# Altium PCB USB_to_UART.PcbDoc
Units mil, origin at the board's own origin, x right, y up, seen from the top; angles counter-clockwise.
Board outline 6000 x 4000 mil, 2 copper layers (Top Layer, Bottom Layer), stack 61.8 mil thick; 15 components, 8 nets, 64 pads, 8 vias.
Unrouted connection lines stored in the file: 8.
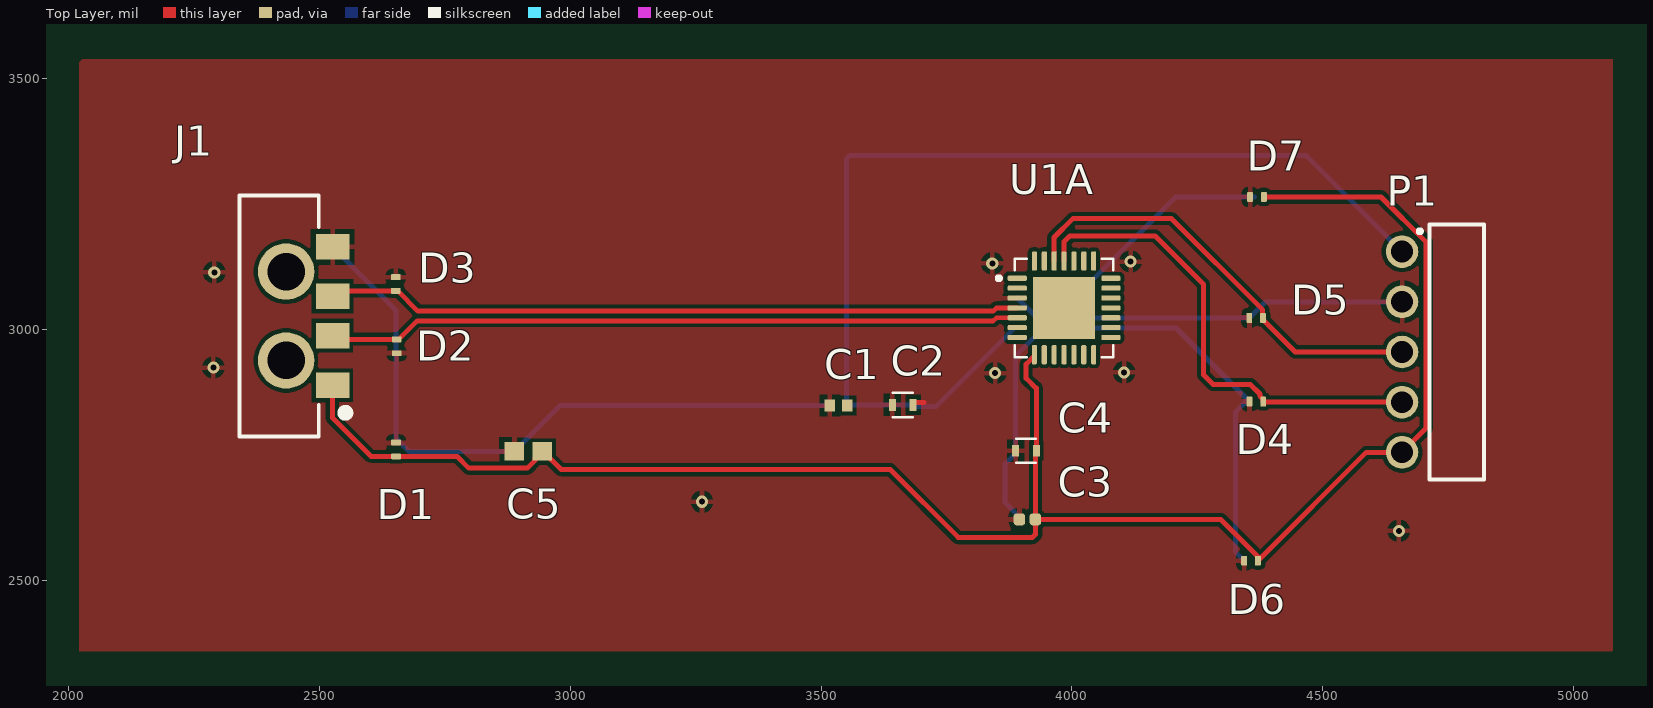
[diagram p0: Top Layer view]
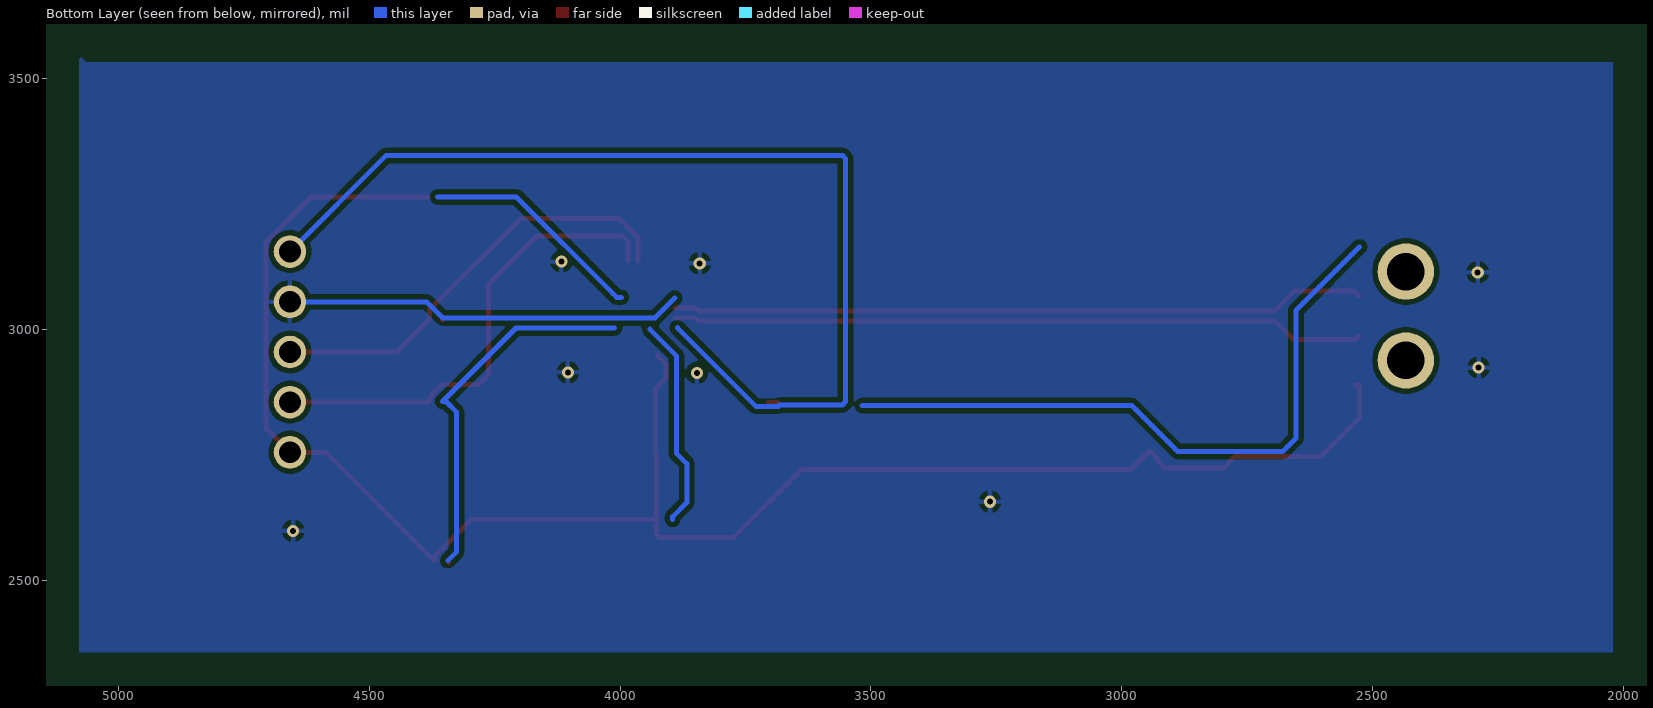
[diagram p1: Bottom Layer view, seen from below]
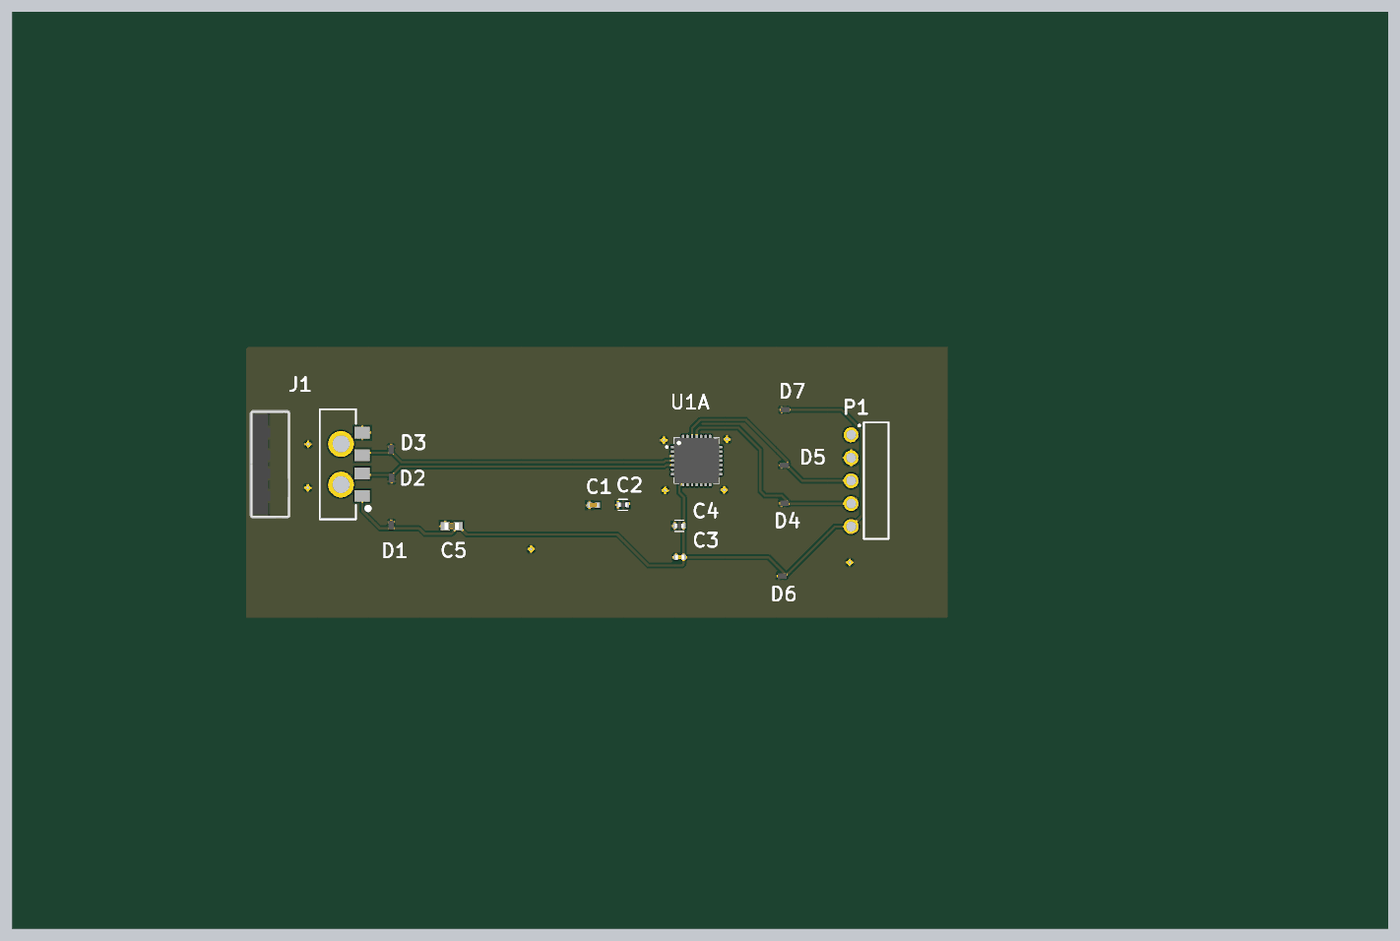
[diagram p2: 3D render of the assembled board from above, using the file's embedded part models]

## Layer stack, top to bottom
Top Solder: solder mask 0.4, SM-001, Dk 3.5
Top Layer: signal copper 1.4
Dielectric 1: core 59, FR-4, Dk 4.8
Bottom Layer: signal copper 1.4
Bottom Solder: solder mask 0.4, SM-001, Dk 3.5

## Board outline
1000,1000 7000,1000 7000,5000 1000,5000

## Design rules (kind name [scope] priority, off if disabled: settings)
Clearance [All] p1: gap=8 ignorepadtopadclearanceinfootprint=FALSE except(0: Arc-Hole Track-Hole SMDPad-Hole THPad-Hole Via-Hole Fill-Hole Poly-Hole Region-Hole Text-Hole)
DiffPairsRouting [InDifferentialPair('USB_D')] p1: maxlimit=5 minlimit=5 mostfreqgap=5 toplayer_minwidth=9.44 toplayer_maxwidth=9.44 toplayer_prefwidth=9.44 bottomlayer_minwidth=9.44 bottomlayer_maxwidth=9.44 bottomlayer_prefwidth=9.44 impedanceprofiledriven=TRUE impedanceprofileid={4D9A5D15-E294-4E31-8F8D-3654DE46FBC7} impedanceprofilevalue=90.000000 maxuncoupledlength=500
PolygonConnect [All] p1: connectstyle=Relief reliefconductorwidth=10 reliefentries=4 polygonreliefangle="90 Angle" airgapwidth=10
RoomDefinition USB_TO_UART_ [InComponentClass('USB_TO_UART_')] p1: confinementstyle=ConfineIn formatcopy=TRUE lockcomponents=FALSE outline 2018.25,2351.75 5077.97,2351.75 5077.97,3536.25 2018.25,3536.25
RoutingVias [All] p1: holewidth=12 width=25 viastyle="Through Hole" minholewidth=8 minwidth=15 maxholewidth=125 maxwidth=130
SolderMaskExpansion [All] p1: expansion=4 istentingtop=FALSE
Width [All] p1: maxlimit=10 minlimit=10 preferedwidth=10
29 further rules are at their usual default settings.

## Classes and differential pairs
differential pair USB_D: +USB_D_P -USB_D_N

## Components (designator, comment, footprint, x,y, rotation, side; value= is the part's Value field where it differs from the comment)
C1 "4.7uF" CAPC1005X65N 3534.75,2847.75 r0 top
C2 "100nF" CAPC1005X55N#1 3663,2849 r0 top
C3 "1uF" CAPC1005X55N#2 3911.25,2620.75 r0 top
C4 "100nF" CAPC1005X55N#1 3908.5,2757.75 r0 top
C5 "10uF" CAPC1608X90N 2916.5,2756.25 r0 top
D1 "" DIO_TPD1E10B06DPYR 2653,2760.25 r270 top
D2 "" DIO_TPD1E10B06DPYR 2654.5,2965.78 r90 top
D3 "" DIO_TPD1E10B06DPYR 2652.5,3090 r270 top
D4 "" DIO_TPD1E10B06DPYR 4367.53,2855.75 r0 top
D5 "" DIO_TPD1E10B06DPYR 4367.22,3022.25 r0 top
D6 "" DIO_TPD1E10B06DPYR 4357.03,2538.5 r0 top
D7 "" DIO_TPD1E10B06DPYR 4368.75,3263.5 r0 top
J1 "629004113921" 629004113921 2124.93,3026.12 r270 top
P1 "" 61300511021 4767,2954.5 r90 top
U1A "CP2102-GM" QFN50P500X500X100-29N 3984.31,3042.31 r0 top

## Footprints (in the part's own frame and the unit in brackets; to place one, negate y for a bottom-side part, rotate by r counter-clockwise, add the part's x,y. Pads: shape width x height; smd on the part's side, far side on the other; paste and mask are expansions set on the pad)
61300511021 [mm]
  round 1.65 hole 1.1: 1(5.08,2.77) 2(2.54,2.77) 3(0,2.77) 4(-2.54,2.77) 5(-5.08,2.77)
  silkscreen extent -6.45,-1.37 6.45,1.97
629004113921 [mm]
  rect 1.3x1.7 smd: 1(3.5,10.2) 2(1,10.2) 3(-1,10.2) 4(-3.5,10.2)
  round 2.85 hole 1.9: S1(-2.25,7.85) S2(2.25,7.85)
  silkscreen extent -6.1,5.5 6.1,11.05, body extent -6,-2.25 6,2.25, height 7.37
CAPC1005X55N#1 [mm]
  rect 0.35x0.6 smd: 1(-0.525,0) 2(0.525,0)
  silkscreen extent -0.5,-0.62 0.5,0.62, body extent -0.5,-0.25 0.5,0.25, height 0.55
CAPC1005X55N#2 [mm]
  rrect53% 0.59x0.6 smd: 1(-0.405,0) 2(0.405,0)
  body extent -0.5,-0.25 0.5,0.25, height 0.55
CAPC1005X65N [mm]
  rect 0.53x0.6 smd: 1(-0.437,0) 2(0.437,0)
  body extent -0.5,-0.25 0.5,0.25, height 0.55
CAPC1608X90N [mm]
  rect 1.01x0.93 smd: 1(-0.709,0) 2(0.709,0)
  body extent -0.8,-0.4 0.8,0.4, height 0.9
DIO_TPD1E10B06DPYR [mm]
  rrect35% 0.3x0.5 smd paste+0 mask+0: 1(-0.35,0) 2(0.35,0)
  body extent -0.5,-0.3 0.5,0.3, height 0.45
QFN50P500X500X100-29N [mm]
  rrect50% 0.97x0.26 smd: 1(-2.37,1.5) 2(-2.37,1) 3(-2.37,0.5) 4(-2.37,0) 5(-2.37,-0.5) 6(-2.37,-1) 7(-2.37,-1.5) 15(2.37,-1.5) 16(2.37,-1) 17(2.37,-0.5) 18(2.37,0) 19(2.37,0.5) 20(2.37,1) 21(2.37,1.5)
  rrect50% 0.26x0.97 smd: 8(-1.5,-2.37) 9(-1,-2.37) 10(-0.5,-2.37) 11(0,-2.37) 12(0.5,-2.37) 13(1,-2.37) 14(1.5,-2.37) 22(1.5,2.37) 23(1,2.37) 24(0.5,2.37) 25(0,2.37) 26(-0.5,2.37) 27(-1,2.37) 28(-1.5,2.37)
  rect 3.15x3.15 smd paste-0.585: 29(0,0)
  silkscreen extent -3.4,-2.5 2.5,2.5, body extent -2.5,-2.5 2.5,2.5, height 1

## Part data
C1: library part C1005X5R1A475K050BC, "Capacitance:4.7ÂµF; Voltage(DC):10V; Capacitor Case / Package:0402 [1005 Metric]; Capacitance Tolerance:Â± 10%; Dielectric Characteristic:X5R; Product Range:C Series; Product Length:1.02mm; Product Width:0.5mm; Qualification:- RoHS Compliant: Yes", Package="1005-2 TDK", Check_prices=https://www.snapeda.com/parts/C1005X5R1A475K050BC./TDK/view-part/?ref=eda, MF=TDK, MP=C1005X5R1A475K050BC., SnapEDA_Link=https://www.snapeda.com/parts/C1005X5R1A475K050BC./TDK/view-part/?ref=snap
C2 C4: library part CC0402KRX7R7BB104, "0.1 ÂµF Â±10% 16V Ceramic Capacitor X7R 0402 (1005 Metric)", Package="0402 Yageo", Check_prices=https://www.snapeda.com/parts/CC0402KRX7R7BB104/Yageo/view-part/?ref=eda, MF=Yageo, MP=CC0402KRX7R7BB104, SnapEDA_Link=https://www.snapeda.com/parts/CC0402KRX7R7BB104/Yageo/view-part/?ref=snap
C3: library part C0402C105K8PACTU, "1 ÂµF Â±10% 10V Ceramic Capacitor X5R 0402 (1005 Metric)", Package="0402 Kemet", Check_prices=https://www.snapeda.com/parts/C0402C105K8PACTU/KEMET/view-part/?ref=eda, MF=KEMET, MP=C0402C105K8PACTU, SnapEDA_Link=https://www.snapeda.com/parts/C0402C105K8PACTU/KEMET/view-part/?ref=snap
C5: library part C1608X5R1A106K080AC, "10ÂµF Â±10% 10V Ceramic Capacitor X5R 0603 (1608 Metric)", Package="1608 TDK", Availability="In Stock", Check_prices=https://www.snapeda.com/parts/C1608X5R1A106K080AC/TDK-Lambda+Americas+Inc/view-part/?ref=eda, MF=TDK, MP=C1608X5R1A106K080AC, Price=None, Purchase-URL=https://pricing.snapeda.com/search/part/C1608X5R1A106K080AC/?ref=eda, SnapEDA_Link=https://www.snapeda.com/parts/C1608X5R1A106K080AC/TDK-Lambda+Americas+Inc/view-part/?ref=snap
D1 D2 D3 D4 D5 D6 D7: library part TPD1E10B06DPYR, "12-pF, Â±5.5V, Â±30-kV ESD protection diode in 0402 and SOD-523 package", Package="X1SON-2 Texas Instruments", Check_prices=https://www.snapeda.com/parts/TPD1E10B06DPYR/Texas+Instruments/view-part/?ref=eda, MF="Texas Instruments", MP=TPD1E10B06DPYR, SnapEDA_Link=https://www.snapeda.com/parts/TPD1E10B06DPYR/Texas+Instruments/view-part/?ref=snap
J1: "Type A Plug Horizontal SMT - with Clips", Package=None, Check_prices=https://www.snapeda.com/parts/629004113921/Wurth+Electronics/view-part/?ref=eda, MF="Wurth Electronics", MP=629004113921, SnapEDA_Link=https://www.snapeda.com/parts/629004113921/Wurth+Electronics/view-part/?ref=snap
P1: library part 6130XX11021_61300511021, "5 pins, 1 row, right angled, gold plating", Package=None, Check_prices=https://www.snapeda.com/parts/61300511021/Wurth+Electronics/view-part/?ref=eda, MF="Wurth Electronics", MP=61300511021, SnapEDA_Link=https://www.snapeda.com/parts/61300511021/Wurth+Electronics/view-part/?ref=snap
U1A: "USB Bridge, USB to UART USB 2.0 UART Interface 28-QFN (5x5)", Package="QFN-28 Silicon Labs", Check_prices=https://www.snapeda.com/parts/CP2102-GM/Silicon+Labs/view-part/?ref=eda, MF="Silicon Labs", MP=CP2102-GM, SnapEDA_Link=https://www.snapeda.com/parts/CP2102-GM/Silicon+Labs/view-part/?ref=snap

## Via types
v1: diameter 24, hole 12, Top Layer to Bottom Layer, 8 vias

## Nets (pads, with @x,y where several pads share a name; then routed paths per layer and width w, separated by ;. In a path a pad name is that pad's centre, name@x,y a point inside that pad or via, vN(x,y) a via of type N, cw(c..) or ccw(c..) an arc to the next point about the centre after c; other vN are vias at no path point)
GND: C1.1 C2.1 C3.1 C4.1 C5.1 D1.1 D2.1 D3.1 D4.1 D5.1 D6.1 D7.1 J1.4 P1.2 U1A.3 U1A.29 | length 810.4
  Top Layer w10: C4.1@3887.83,2752.83 C4.1 ; D6.1@4340.71,2534.75 4343.25,2537.3 D6.1 ; D5.1@4353.44,3018.31 D5.1
  Bottom Layer w10: 3891,3061.99 3930.74,3022.25 4353.44,3022.25 4385.69,3054.5 P1.2
  other v1: 4651.5,2598 3262.75,2656 3847,2912.5 4104,2914 2289,2923.5 2290.75,3113.25 3841.25,3131.25 4117,3134.75
NetD4_2: D4.2 P1.4 U1A.25 | length 965.2
  Top Layer w10: U1A.25 3984.31,3174.31 3996,3186 4165.5,3186 4262.5,3089 4262.5,2908.61 4281.51,2889.6 4355.65,2889.6 4374.66,2870.59 4374.66,2866.34 4377.98,2863.01 4381.31,2859.69 D4.2 4381.31,2855.41 4382.21,2854.5 P1.4
NetD5_2: D5.2 P1.3 U1A.26 | length 877.6
  Top Layer w10: U1A.26 3964.31,3135.61 3964.31,3182.59 4001.72,3220 4198.5,3220 4380.09,3038.41 4380.09,3019.22 4444.81,2954.5 P1.3
NetJ1_S1: J1.S1 J1.S2
USB_D_N: D2.2 J1.2 U1A.5 | length 1380.2
  Top Layer w9.44: 2441.75,2962.93 2441.88,2962.79 ; J1.2 2533.69,2979.56 D2.2 ; D2.2@2659.44,2980.56 2695.19,3016.32 3843.44,3016.32 3849.75,3022.62 U1A.5
USB_D_P: D3.2 J1.3 U1A.4 | length 1388.2
  Top Layer w9.44: J1.3 2537.23,3076.22 D3.2 2656.44,3076.22 2696.66,3036 3843.44,3036 3849.75,3042.31 U1A.4
VBUS: C3.2 C4.2 C5.2 D1.2 D6.2 D7.2 J1.1 P1.5 U1A.7 U1A.8 | length 3640.9
  Top Layer w10: J1.1@2534.37,2888.32 J1.1 2526.5,2823.19 2603.22,2746.47 D1.2 2774.5,2746.47 2798.03,2722.94 2914.68,2722.94 2929.53,2737.79 2929.53,2742.94 2942.84,2756.25 C5.2 2945.99,2756.25 2981.99,2720.25 3638,2720.25 3773.25,2585 3921.34,2585 3927.19,2590.86 C3.2 ; U1A.8 3925.25,2946.75 3908.75,2930.25 3908.75,2902 3928.17,2882.58 3929.17,2882.58 C4.2 3929.17,2752.83 3927.19,2750.85 C3.2 ; D7.2 4616.09,3263.5 4705.43,3174.17 4705.43,2801.98 P1.5 4586.81,2754.5 4375.65,2543.34 4371.71,2543.34 4370.81,2542.44 D6.2 4369.9,2539.41 4369.9,2547.6 4296.75,2620.75 C3.2
VDD: C1.2 C2.2 P1.1 U1A.6 | length 2103
  Top Layer w10: C2.2 3683.67,2851.48 3685.56,2853.37 3705.56,2853.37
  Bottom Layer w10: 3886,3002.75 3729.5,2846.25 3684.75,2846.25 3682.25,2848.75 3556.86,2848.75 3551,2854.61 3551,3340.39 3556.86,3346.25 4466.19,3346.25 P1.1
pads on no net: U1A.1 U1A.2 U1A.9 U1A.10 U1A.11 U1A.12 U1A.13 U1A.14 U1A.15 U1A.16 U1A.17 U1A.18 U1A.19 U1A.20 U1A.21 U1A.22 U1A.23 U1A.24 U1A.27 U1A.28
copper on no net: | length 2960.2
  Bottom Layer w10: 2526.5,3163.92 2653,3037.42 2653,2782.69 2679.44,2756.25 2888.59,2756.25 2980.09,2847.75 3497.55,2847.75 3517.55,2847.75 ; 3895.31,2620.75 3895.31,2626.19 3867,2654.5 3867,2732 3887.83,2752.83 3887.83,2946.83 3940.75,2999.75 ; 3997.5,3063.5 4006.75,3063.5 4014.75,3071.5 4206.75,3263.5 4363.63,3263.5 ; 4011.25,3002.25 4207.25,3002.25 4353.75,2855.75 4347.58,2855.75 4346.75,2855.75 4326.25,2835.25 4326.25,2555.5 4343.25,2538.5

## Polygon pours and split planes (outlines as drawn)
GND on Bottom Layer (solid, pour order 0): 2021.25,2358.25 2019.25,2356.25 5078.25,2356.25 5078.25,3538 5074,3542.25 5063.75,3532 2021.25,3532 5063.75,3532 2021.25,3532
GND on Top Layer "GND_L01_P001" (solid, pour order 1): 2021.25,3532 2021.25,2358.25 5076.25,2358.25 5078.25,2356.25 5078.25,3538 2027.25,3538

## Text inside footprints (layer, text, board x,y; h text height)
J1: Mechanical 13 "PCB END" at 2365.08,3073.36 h16 r270